# EAGLE board mcu_ori (EAGLE 9.5.0)
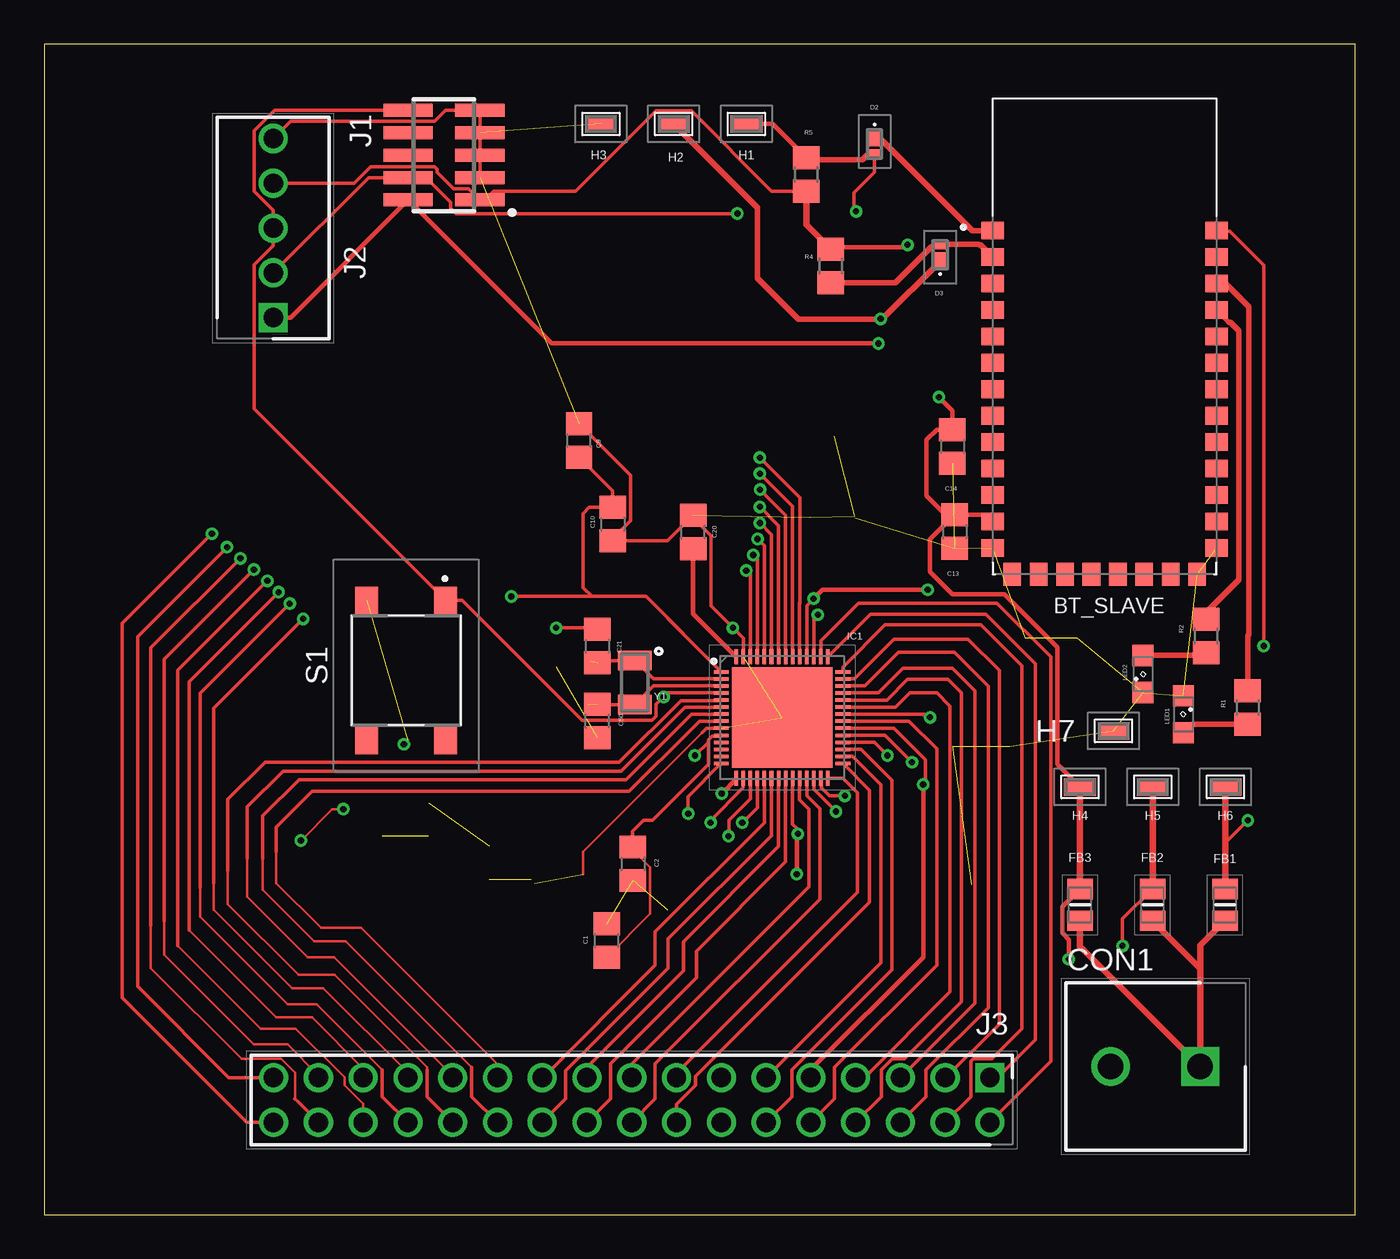
[diagram p0: board, top side]
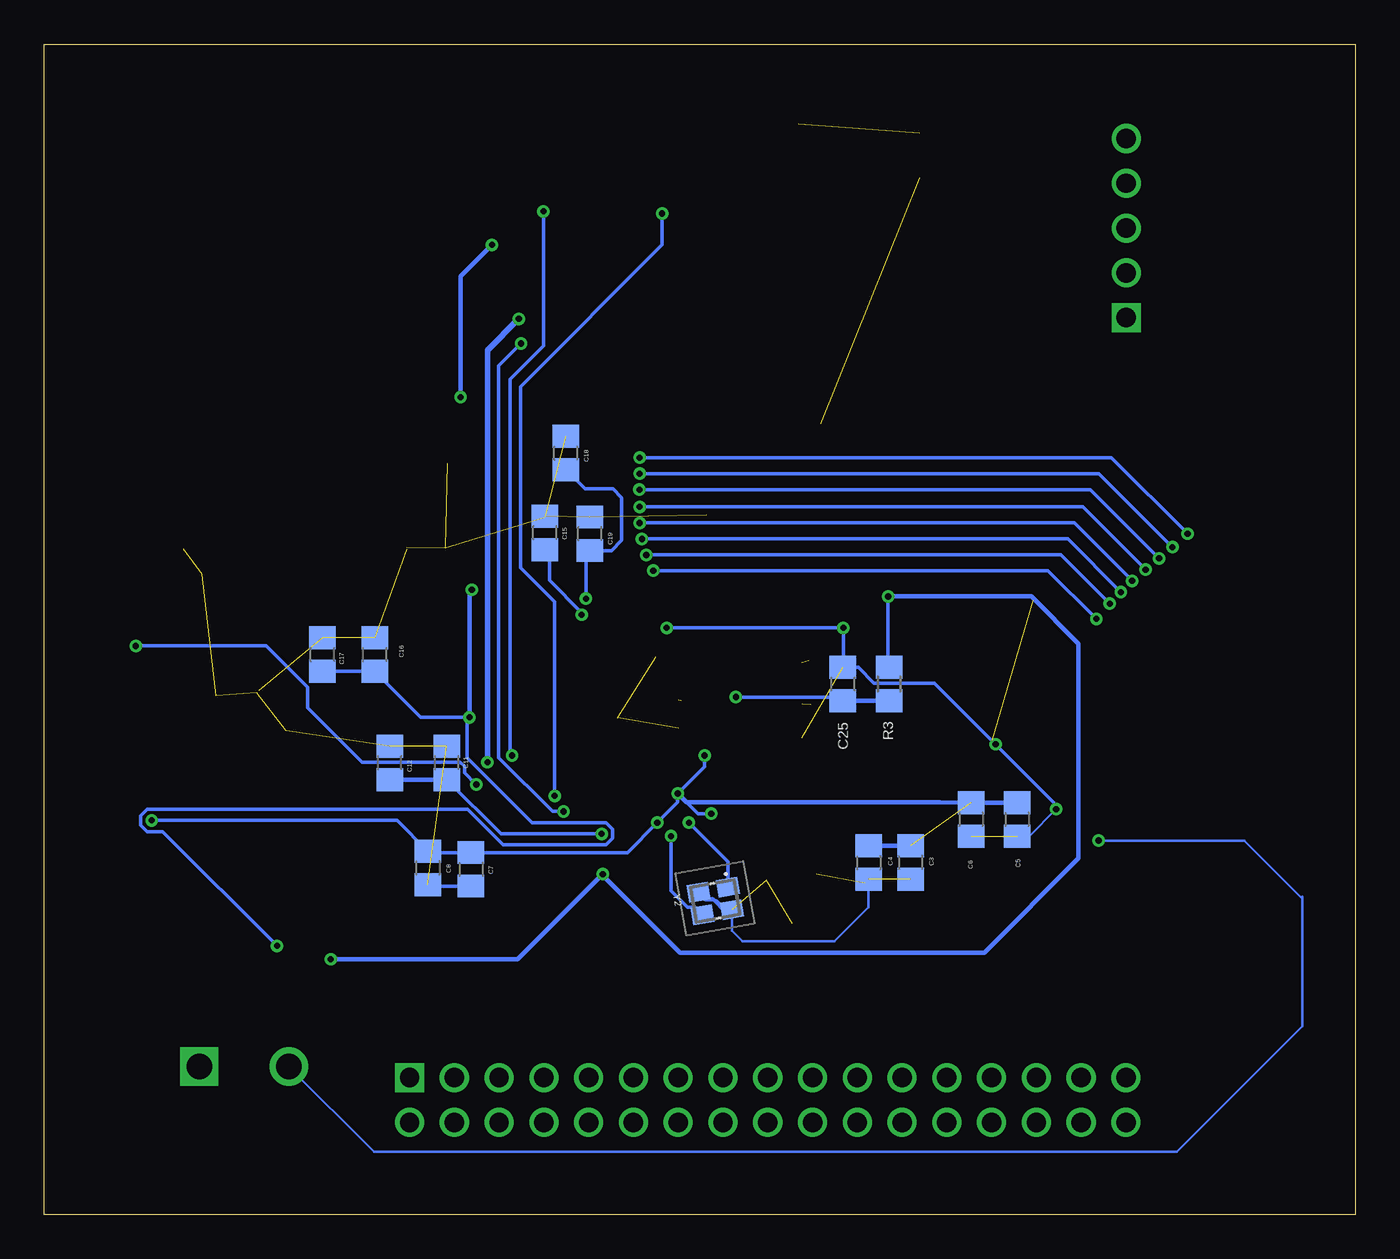
[diagram p1: board, bottom side, seen from below]

Size 74.4 x 66.38 mm. Coordinates in mm from the lower left corner, seen from the top.
Outline: 0,0 74.4,0 74.4,66.38 0,66.38 0,0
Copper layers (1*16): Top 0.0356mm / dielectric 1.5011mm / Bottom 0.0356mm
Design rules "ECE_Senior_Design": minimum track width 8mil, minimum drill 13mil, track to track 8mil, track to pad 8mil, pad to pad 6mil, via to via 8mil, smd to smd 6mil, copper to edge 15mil, drill to drill 8mil, minimum pad ring 7mil, minimum via ring 7mil, stop-mask expansion 3mil, vias tented up to drill 0mil, thermal gap 10mil

## Footprints (pad centres in the part's own frame; a part is rotated, then mirrored left to right if it is on the bottom)
XCVR_HC-05 = smd 1.3 x 1: 1 -6.35,6.325; 2 -6.35,4.825; 3 -6.35,3.325; 4 -6.35,1.825; 5 -6.35,0.325; 6 -6.35,-1.175; 7 -6.35,-2.675; 8 -6.35,-4.175; 9 -6.35,-5.675; 10 -6.35,-7.175; 11 -6.35,-8.675; 12 -6.35,-10.175; 13 -6.35,-11.675; 22 6.35,-11.675; 23 6.35,-10.175; 24 6.35,-8.675; 25 6.35,-7.175; 26 6.35,-5.675; 27 6.35,-4.175; 28 6.35,-2.675; 29 6.35,-1.175; 30 6.35,0.325; 31 6.35,1.825; 32 6.35,3.325; 33 6.35,4.825; 34 6.35,6.325 | smd 1 x 1.3: 14 -5.25,-13.175; 15 -3.75,-13.175; 16 -2.25,-13.175; 17 -0.75,-13.175; 18 0.75,-13.175; 19 2.25,-13.175; 20 3.75,-13.175; 21 5.25,-13.175
C0805 = smd 1.3 x 1.5: 1 -0.95,0; 2 0.95,0
SHDR2W90P0X508_1X2_1016X950X15 = drill 1.45 pad 2.175 square: 1 0,0 | drill 1.45 pad 2.175: 2 5.08,0
B5819XPTP = smd 1 x 0.76: 1 -0.365,0 | smd 0.56 x 0.7: 2 0.585,0
BEADC2012X105N = smd 1.15 x 1.45: 1 -0.9,0; 2 0.9,0
S276146R = smd 1.8 x 1: 1 0,0
QFN40P700X700X60-57N = smd 0.85 x 0.2: 1 -3.45,2.6; 2 -3.45,2.2; 3 -3.45,1.8; 4 -3.45,1.4; 5 -3.45,1; 6 -3.45,0.6; 7 -3.45,0.2; 8 -3.45,-0.2; 9 -3.45,-0.6; 10 -3.45,-1; 11 -3.45,-1.4; 12 -3.45,-1.8; 13 -3.45,-2.2; 14 -3.45,-2.6; 29 3.45,-2.6; 30 3.45,-2.2; 31 3.45,-1.8; 32 3.45,-1.4; 33 3.45,-1; 34 3.45,-0.6; 35 3.45,-0.2; 36 3.45,0.2; 37 3.45,0.6; 38 3.45,1; 39 3.45,1.4; 40 3.45,1.8; 41 3.45,2.2; 42 3.45,2.6 | smd 0.2 x 0.85: 15 -2.6,-3.45; 16 -2.2,-3.45; 17 -1.8,-3.45; 18 -1.4,-3.45; 19 -1,-3.45; 20 -0.6,-3.45; 21 -0.2,-3.45; 22 0.2,-3.45; 23 0.6,-3.45; 24 1,-3.45; 25 1.4,-3.45; 26 1.8,-3.45; 27 2.2,-3.45; 28 2.6,-3.45; 43 2.6,3.45; 44 2.2,3.45; 45 1.8,3.45; 46 1.4,3.45; 47 1,3.45; 48 0.6,3.45; 49 0.2,3.45; 50 -0.2,3.45; 51 -0.6,3.45; 52 -1,3.45; 53 -1.4,3.45; 54 -1.8,3.45; 55 -2.2,3.45; 56 -2.6,3.45 | smd 5.7 x 5.7: 57 0,0
FTSH-105-01-L-DV-K = smd 0.74 x 2.79: 1 -2.54,-2.035; 2 -2.54,2.035; 3 -1.27,-2.035; 4 -1.27,2.035; 5 0,-2.035; 6 0,2.035; 7 1.27,-2.035; 8 1.27,2.035; 9 2.54,-2.035; 10 2.54,2.035
HDRV5W64P0X254_1X5_1255X635X81 = drill 1.1 pad 1.65 square: 1 0,0 | drill 1.1 pad 1.65: 2 2.54,0; 3 5.08,0; 4 7.62,0; 5 10.16,0
HDRV34W90P254_2X17_4308X500X56 = drill 1.1 pad 1.65 square: 1 0,0 | drill 1.1 pad 1.65: 2 0,2.54; 3 2.54,0; 4 2.54,2.54; 5 5.08,0; 6 5.08,2.54; 7 7.62,0; 8 7.62,2.54; 9 10.16,0; 10 10.16,2.54; 11 12.7,0; 12 12.7,2.54; 13 15.24,0; 14 15.24,2.54; 15 17.78,0; 16 17.78,2.54; 17 20.32,0; 18 20.32,2.54; 19 22.86,0; 20 22.86,2.54; 21 25.4,0; 22 25.4,2.54; 23 27.94,0; 24 27.94,2.54; 25 30.48,0; 26 30.48,2.54; 27 33.02,0; 28 33.02,2.54; 29 35.56,0; 30 35.56,2.54; 31 38.1,0; 32 38.1,2.54; 33 40.64,0; 34 40.64,2.54
SML0805 = smd 1.2 x 1.2: A 1.05,0; C -1.05,0
R0805 = smd 1.3 x 1.5: 1 -0.95,0; 2 0.95,0
DTSM63NVB = smd 1.55 x 1.3: 1 -3.975,2.25; 2 3.975,2.25; 3 -3.975,-2.25; 4 3.975,-2.25
ECX-31B = smd 1.1 x 1.9: 1 -1.25,0; 2 1.25,0
ECS240836QAESTR = smd 1.2 x 1: 1 -0.85,-0.65; 2 0.85,-0.65; 3 0.85,0.65; 4 -0.85,0.65

## Placement (x,y rotation side)
BT_SLAVE  HC-05  [XCVR_HC-05]  60.17,49.48 0 top
C1  0.1u  [C0805]  31.93,15.54 90 top
C2  1u  [C0805]  33.41,19.89 270 top
C3  0.1u  [C0805]  25.24,19.98 270 bottom
C4  1u  [C0805]  27.62,19.96 270 bottom
C5  0.1u  [C0805]  19.19,22.41 270 bottom
C6  1u  [C0805]  21.81,22.41 270 bottom
C7  0.1u  [C0805]  50.17,19.58 270 bottom
C8  1u  [C0805]  52.63,19.66 270 bottom
C9  0.1u  [C0805]  30.35,43.9 90 top
C10  1u  [C0805]  32.26,39.16 270 top
C11  0.1u  [C0805]  51.55,25.61 90 bottom
C12  1u  [C0805]  54.79,25.61 90 bottom
C13  0.1u  [C0805]  51.66,38.73 270 top
C14  1u  [C0805]  51.53,43.56 270 top
C15  1uF  [C0805]  45.99,38.65 90 bottom
C16  0.1u  [C0805]  55.64,31.75 90 bottom
C17  1u  [C0805]  58.6,31.75 90 bottom
C18  0.1u  [C0805]  44.8,43.18 90 bottom
C19  1u  [C0805]  43.44,38.61 90 bottom
C20  1u  [C0805]  36.82,38.7 90 top
C21  18pF  [C0805]  31.39,32.23 270 top
C25  100p  [C0805]  29.08,30.09 90 bottom
C50  36pF  [C0805]  31.39,27.98 90 top
CON1  1888687  [SHDR2W90P0X508_1X2_1016X950X15]  65.6,8.39 180 top
D2  B5819XP-TP  [B5819XPTP]  47.12,60.72 270 top
D3  B5819XP-TP  [B5819XPTP]  50.84,54.44 90 top
FB1  330ohm, 100MHz  [BEADC2012X105N]  66.99,17.56 90 top
FB2  330ohm, 100MHz  [BEADC2012X105N]  62.88,17.56 90 top
FB3  330ohm, 100MHz  [BEADC2012X105N]  58.77,17.56 90 top
H1  S2761-46R  [S276146R]  39.84,61.85 0 top
H2  S2761-46R  [S276146R]  35.72,61.85 0 top
H3  S2761-46R  [S276146R]  31.59,61.85 0 top
H4  S2761-46R  [S276146R]  58.77,24.26 0 top
H5  S2761-46R  [S276146R]  62.9,24.26 0 top
H6  S2761-46R  [S276146R]  67.02,24.26 0 top
H7  S2761-46R  [S276146R]  60.67,27.43 0 top
IC1  CY8C4247LQI-BL483  [QFN40P700X700X60-57N]  41.87,28.18 0 top
J1  MINIPROG3  [FTSH-105-01-L-DV-K]  22.69,60.08 90 top
J2  SWD  [HDRV5W64P0X254_1X5_1255X635X81]  13,50.87 90 top
J3  90131-0937  [HDRV34W90P254_2X17_4308X500X56]  53.66,7.77 180 top
LED1  [SML0805]  64.64,28.36 270 top
LED2  [SML0805]  62.35,30.66 90 top
R1  470  [R0805]  68.29,28.76 270 top
R2  470  [R0805]  65.92,32.81 270 top
R3  4.7k  [R0805]  26.45,30.09 90 bottom
R4  4.7k  [R0805]  44.63,53.79 90 top
R5  10k  [R0805]  43.24,58.99 270 top
S1  DTSM-63N-V-B  [DTSM63NVB]  20.54,30.86 270 top
Y1  32.768KHz  [ECX-31B]  33.52,30.17 270 top
Y2  24MHz  [ECS240836QAESTR]  36.31,17.79 190 bottom

## Library data of the parts
BT_SLAVE = HC-05; AVAILABILITY: Unavailable; MF: Texas Instruments; MP: HC-05; PACKAGE: SOIC-14; PRICE: None; SPICEPREFIX: X
C1-C21 C25 C50 = rcl; SPICEPREFIX: C
CON1 = SamacSys_Parts; ALLIED_NUMBER: 70054422; DESCRIPTION: Phoenix Contact COMBICON MKDSN Series 5.08mm Pitch Straight PCB Terminal Block with Screw Termination, Through Hole; HEIGHT: 15mm; MANUFACTURER_NAME: Phoenix Contact; MANUFACTURER_PART_NUMBER: 1888687; RS_PART_NUMBER: 8045095; RS_PRICE-STOCK: http://uk.rs-online.com/web/p/products/8045095
D2 D3 = SamacSys_Parts; DESCRIPTION: Schottky Diodes & Rectifiers 1A,40V,Schottky,FBP-02L Package; HEIGHT: 0.55mm; MANUFACTURER_NAME: Micro Commercial Components (MCC); MANUFACTURER_PART_NUMBER: B5819XP-TP
FB1-FB3 = BLM21PG331SN1D; DESCRIPTION: Ferrite bead 0805 SMD 330R 1.5A Ferrite bead 0805 SMD 330R 1.5A; HEIGHT: 1.05mm; MANUFACTURER_NAME: Murata Electronics; MANUFACTURER_PART_NUMBER: BLM21PG331SN1D; RS_PART_NUMBER: 7241545P; RS_PRICE-STOCK: http://uk.rs-online.com/web/p/products/7241545P
H1-H7 = S2761-46R; DESCRIPTION: Circuit Board Hardware - PCB SMT Mini Test Terminal, Reel; HEIGHT: 1.15mm; MANUFACTURER_NAME: HARWIN; MANUFACTURER_PART_NUMBER: S2761-46R
IC1 = cy_mcu; DESCRIPTION: CYPRESS SEMICONDUCTOR - CY8C4247LQI-BL483 - MCU, 32BIT, CORTEX-M0, 48MHZ, QFN-56; HEIGHT: 0.6mm; MANUFACTURER_NAME: Cypress Semiconductor; MANUFACTURER_PART_NUMBER: CY8C4247LQI-BL483; RS_PART_NUMBER: 1242964P; RS_PRICE-STOCK: http://uk.rs-online.com/web/p/products/1242964P
J1 = SamacSys_Parts; DESCRIPTION: SMT Micro Header, 10 position, 2-row; HEIGHT: mm; MANUFACTURER_NAME: SAMTEC; MANUFACTURER_PART_NUMBER: FTSH-105-01-L-DV-K; RS_PART_NUMBER: 1592332; RS_PRICE-STOCK: https://uk.rs-online.com/web/p/products/1592332
J2 = SamacSys_Parts; ALLIED_NUMBER: 70190811; DESCRIPTION: Headers & Wire Housings VERT PCB HDR 5P TIN FRICTION LOCK; HEIGHT: 8.18mm; MANUFACTURER_NAME: Molex; MANUFACTURER_PART_NUMBER: 22-23-2051; RS_PART_NUMBER: 1888757; RS_PRICE-STOCK: http://uk.rs-online.com/web/p/products/1888757
J3 = 90131-0937; ALLIED_NUMBER: 70373750; DESCRIPTION: Molex C-GRID III Series, Series Number 90131, 2.54mm Pitch 34 Way 2 Row Straight PCB Header, Solder Termination, 3A; HEIGHT: 5.6mm; MANUFACTURER_NAME: Molex; MANUFACTURER_PART_NUMBER: 90131-0937; RS_PART_NUMBER: 6703569; RS_PRICE-STOCK: http://uk.rs-online.com/web/p/products/6703569
LED1 LED2 = led
R1-R5 = rcl; SPICEPREFIX: R
S1 = push_button; DESCRIPTION: Tactile Switches Surface Mounting Type 6*6; HEIGHT: 7.1mm; MANUFACTURER_NAME: Diptronics; MANUFACTURER_PART_NUMBER: DTSM-63N-V-B
Y1 = SamacSys_Parts; DESCRIPTION: Crystals 32.768KHz 20ppm 12.5pF -40C +85C; HEIGHT: mm; MANUFACTURER_NAME: ECS; MANUFACTURER_PART_NUMBER: ECS-.327-12.5-34B-TR
Y2 = SamacSys_Parts; DESCRIPTION: Crystals 24MHz 10ppm; HEIGHT: 0mm; MANUFACTURER_NAME: ECS; MANUFACTURER_PART_NUMBER: ECS-240-8-36CKM-TR; SPICEPREFIX: E

## Nets
3V3: CON1.1 FB1.1 FB2.1 FB3.1
/XRES: C25.1 IC1.4 J1.10 J2.3 R3.1 S1.1
BT_RX: BT_SLAVE.2 D3.2 R4.1
BT_TX: BT_SLAVE.1 D2.1
GND: BT_SLAVE.13 BT_SLAVE.21 BT_SLAVE.22 C1.2 C2.2 C3.2 C4.2 C5.2 C6.2 C7.2 C8.2 C9.2 C10.2 C11.2 C12.2 C13.2 C14.2 C15.2 C16.2 C17.2 C18.2 C19.2 C20.2 C21.1 C25.2 C50.1 CON1.2 H3.1 H7.1 IC1.9 IC1.55 IC1.57 J1.3 J1.5 J1.7 J1.9 J2.5 LED1.C LED2.C S1.3 Y2.2 Y2.4
IND1: BT_SLAVE.32 R1.1
IND2: BT_SLAVE.31 R2.1
MID1: LED1.A R1.2
MID2: LED2.A R2.2
P0.0: IC1.19 J3.21
P0.1: IC1.20 J3.22
P0.2: IC1.21 J3.19
P0.3: IC1.22 J3.20
P0.4: IC1.24 J3.17
P0.5: IC1.25 J3.18
P0.6: IC1.26 J1.2 J2.1
P0.7: IC1.27 J1.4 J2.2
P1.0: IC1.28 J3.15
P1.1: IC1.29 J3.16
P1.2: IC1.30 J3.11
P1.3: IC1.31 J3.12
P1.4: D2.2 H1.1 IC1.32 R5.1
P1.5: D3.1 H2.1 IC1.33
P1.6: BT_SLAVE.34 IC1.34 J3.9
P1.7: IC1.35 J3.10
P2.0: IC1.37 J3.7
P2.1: IC1.38 J3.8
P2.2: IC1.39 J3.5
P2.3: IC1.40 J3.6
P2.4: IC1.41 J3.3
P2.5: IC1.42 J3.4
P2.6: IC1.43 J3.1
P2.7: IC1.44 J3.2
P3.0: IC1.47 J3.34
P3.1: IC1.48 J3.33
P3.2: IC1.49 J3.32
P3.3: IC1.50 J3.31
P3.4: IC1.51 J3.30
P3.5: IC1.52 J3.29
P3.6: IC1.53 J3.28
P3.7: IC1.54 J3.27
P4.0: IC1.5 J3.26
P4.1: IC1.6 J3.25
P5.0: IC1.7 J3.24
P5.1: IC1.8 J3.23
P6.0: C21.2 IC1.2 Y1.1
P6.1: C50.2 IC1.3 Y1.2
VCCD: C20.1 IC1.56
VDDA: C16.1 C17.1 C18.1 C19.1 FB2.2 H5.1 IC1.36 IC1.46
VDDD: BT_SLAVE.12 C9.1 C10.1 C11.1 C12.1 C13.1 C14.1 FB3.2 H4.1 IC1.1 IC1.23 J1.1 J2.4 R3.2 R4.2 R5.2
VDDR: C1.1 C2.1 C3.1 C4.1 C5.1 C6.1 C7.1 C8.1 FB1.2 H6.1 IC1.10 IC1.14 IC1.15 IC1.18
VREF: C15.1 IC1.45
XTAL24I: IC1.16 Y2.1
XTAL24O: IC1.17 Y2.3

## Tracks (layer width: path | path; a pad name or v marks a point on that pad's centre or on a via)
3V3
  Top 0.381: CON1.1 65.6,15.26 FB1.1 | CON1.1 65.6,13.94 FB2.1 | CON1.1 58.77,15.22 FB3.1
/XRES  (via drill 0.35)
  Top 0.203: IC1.4 35.38,29.58 v35.15,29.35 34.73,28.93 34.73,28.27 34.49,28.03 30.53,28.03 23.72,34.84 S1.1 11.93,45.7 11.93,53.85 13,54.93 J2.3 13,56.96 11.93,58.04 11.93,61.47 13.07,62.62 J1.10
  Bottom 0.203: C25.1 29.29,29.35 v35.15,29.35
  Bottom 0.254: 29.72,29.35 C25.1 R3.1
BT_RX
  Top 0.305: BT_SLAVE.2 53.79,54.33 53.75,54.37 53.12,55 53.04,55 53.02,55.02 D3.2 50.69,54.88 50.33,54.88 48.3,52.84 R4.1
BT_TX
  Top 0.305: BT_SLAVE.1 52.67,55.8 47.4,61.08 D2.1
GND  (via drill 0.35)  (27 unrouted)
  Top 0.152: 62.38,29.72 LED2.C 62.22,29.72 | 30.91,33.33 C21.1 | 66.49,37.74 BT_SLAVE.22 | 53.84,37.74 BT_SLAVE.13 | 37.57,27.58 37.33,27.33 30.57,20.58 30.57,19.3 | v14.57,21.21 16.35,22.99 v16.98,22.99
  Top 0.203: J1.9 | J2.5 13.97,62 22.16,62 22.78,62.62 J1.9 | J1.9 J1.7 J1.5 J1.3 | v20.41,26.67 20.63,26.89 | 31.24,26.89 C50.1 | v29.05,33.27 31.3,33.27 C21.1 | IC1.55 39.67,32.69 v39.08,33.27 37.82,34.53 37.82,38.5 36.82,39.51 C20.2 35.38,38.21 C10.2 32.26,38.35 33.26,39.35 33.26,41.94 C9.2 | IC1.9 37.58,27.58 37.33,27.33
  Bottom 0.152: C15.2 46.02,39.52 | 27.83,18.8 C4.2 27.62,17.43 29.56,15.49 34.77,15.49 35.36,16.09 Y2.4 | CON1.2 55.68,3.56 10.13,3.56 3.01,10.67 3.01,17.91 | 3.01,17.91 3.01,18.03 | 3.01,17.91 6.32,21.21 v14.57,21.21 | v16.98,22.99 18.51,21.46 C5.2
  Bottom 0.203: 25.26,19.01 C3.2 | 21.81,21.45 C6.2 | C5.2 19.19,21.6 | 19.2,25.46 v20.41,26.67 | v20.41,26.67 23.88,30.13 27.3,30.13 28.21,31.04 C25.2 29.05,31.07 v29.05,33.27 v39.08,33.27 | C7.2 52.55,18.63 C8.2 | v16.98,22.99 16.98,23.24 v20.41,26.67
  Bottom 0.254: 36.81,18.28 Y2.2 36.88,17.89 36.47,17.89 36.28,17.76 35.82,17.29 Y2.4
IND1
  Top 0.305: R1.1 68.29,32.82 68.36,32.89 68.36,51.47 67.03,52.8 BT_SLAVE.32
IND2
  Top 0.254: 67.21,50.61 BT_SLAVE.31
  Top 0.305: 67.21,50.61 67.29,50.61 67.78,50.12 67.78,36.01 65.92,34.14 R2.1
MID1
  Top 0.305: LED1.A 65.14,27.82 R1.2
MID2
  Top 0.305: R2.2 65.76,31.7 LED2.A
P0.0
  Top 0.203: IC1.19 40.87,22.23 34.67,16.04 34.67,14.12 28.32,7.77 J3.21
P0.1
  Top 0.203: IC1.20 41.27,21.49 35.41,15.63 35.41,13.98 29.59,8.16 29.59,6.56 J3.22
P0.2
  Top 0.152: 41.65,24.64 IC1.21
  Top 0.203: IC1.21 41.67,20.87 36.27,15.48 36.27,13.83 30.8,8.36 J3.19
P0.3
  Top 0.203: IC1.22 42.07,20 37.01,14.94 37.01,13.43 32.14,8.56 32.14,6.56 J3.20
P0.4
  Top 0.203: IC1.24 42.87,23.52 43.4,23 43.4,18.59 33.34,8.53 J3.17
P0.5
  Top 0.203: IC1.25 43.27,23.75 44.01,23.02 44.01,17.88 34.67,8.55 34.67,6.56 J3.18
P0.6  (via drill 0.35)
  Top 0.203: IC1.26 43.67,24.12 v44.92,22.86
  Top 0.254: v47.34,49.4 28.79,49.4 J1.2 13.98,50.87 J2.1
  Bottom 0.203: v44.92,22.86 v44.93,22.86 45.56,22.86 48.61,25.9 48.61,46.61 48.61,48.13 v47.34,49.4
P0.7  (via drill 0.35)
  Top 0.203: J2.2 18.41,58.81 J1.4 21.67,58.81 23.08,57.41 23.08,57.07 23.37,56.77 v39.34,56.77 | IC1.27 44.11,24.69 44.11,24.2 44.57,23.74 v45.43,23.74
  Bottom 0.203: v45.43,23.74 45.43,34.75 47.37,36.7 47.37,46.96 39.34,54.99 v39.34,56.77
P1.0
  Top 0.203: IC1.28 45.34,24.73 46.14,23.92 46.14,18.28 35.88,8.02 J3.15
P1.1
  Top 0.203: IC1.29 46.83,24.07 46.83,17.7 36.96,7.83 36.96,7.32 35.88,6.24 J3.16
P1.2
  Top 0.203: IC1.30 45.87,25.98 47.47,24.38 47.47,14.27 J3.11
P1.3
  Top 0.203: IC1.31 46.36,26.38 48.1,24.64 48.1,13.89 42.42,8.22 42.42,6.69 J3.12
P1.4  (via drill 0.35)
  Top 0.203: IC1.32 47.1,26.78 v47.85,26.04 | 43.78,59.94 R5.1 | D2.2 47.12,59.12 45.94,57.94 45.94,57.02 v46.07,56.9
  Top 0.254: H1.1 41.34,61.85 R5.1
  Top 0.305: R5.1 43.37,59.82 46.42,59.82 46.74,60.13 D2.2
  Bottom 0.203: v47.85,26.04 47.97,26.16 47.97,47.37 46.07,49.28 v46.07,56.9
P1.5  (via drill 0.35)
  Top 0.203: IC1.33 47.71,27.18 v49.24,25.65
  Top 0.254: 45.69,50.77 45.95,50.77
  Top 0.305: 47.54,50.77 45.69,50.77 42.8,50.77 40.48,53.09 40.48,57.09 H2.1 | 47.54,50.77 D3.1 | 47.54,50.77 47.52,50.75 v47.47,50.8
  Bottom 0.305: v49.24,25.65 49.24,49.02 v47.47,50.8
P1.6  (via drill 0.35)
  Top 0.152: 66.64,55.73 BT_SLAVE.34
  Top 0.203: IC1.34 48.21,27.58 50,25.78 50,24.51 v49.88,24.38 | v69.19,32.25 69.19,53.84 67.28,55.75 66.67,55.75 66.64,55.73
  Top 0.254: v49.88,24.38 49.88,14.61 43.5,8.23 J3.9
  Bottom 0.203: v49.88,24.38 50.55,25.06 50.55,25.42 50.79,25.66 56.36,25.66 59.46,28.75 59.46,29.9 61.81,32.25 v69.19,32.25
P1.7
  Top 0.203: IC1.35 49.08,27.98 50.64,26.42 50.64,14.15 44.84,8.34 44.84,6.56 J3.10
P2.0
  Top 0.203: IC1.37 48.31,28.78 49.12,29.59 50.64,29.59 51.4,28.83 51.4,12.62 46.55,7.77 J3.7
P2.1
  Top 0.203: IC1.38 47.82,29.18 48.99,30.35 51.28,30.35 52.04,29.59 52.04,12.06 48.82,8.85 48.14,8.85 47.5,8.22 47.5,6.69 J3.8
P2.2
  Top 0.203: IC1.39 47.33,29.58 48.73,30.99 51.53,30.99 52.8,29.72 52.8,11.99 J3.5
P2.3
  Top 0.203: IC1.40 46.58,29.98 48.48,31.88 51.66,31.88 53.56,29.97 53.56,11.73 50.04,8.22 50.04,6.69 J3.6
P2.4
  Top 0.203: IC1.41 45.97,30.38 48.23,32.64 52.42,32.64 54.2,30.86 54.2,10.79 52.61,9.2 52.58,9.2 51.15,7.77 J3.3
P2.5
  Top 0.203: IC1.42 45.32,31.03 47.72,33.44 53.15,33.44 55.47,31.11 55.47,10.54 53.77,8.85 52.73,8.85 52.58,8.7 52.58,6.69 J3.4
P2.6
  Top 0.203: IC1.43 46.87,34.04 53.43,34.04 56.23,31.24 56.23,9.91 54.09,7.77 J3.1
P2.7
  Top 0.203: IC1.44 44.07,32.54 46.19,34.67 54.07,34.67 57.12,31.62 57.12,8.68 J3.2
P3.0  (via drill 0.35)
  Top 0.203: IC1.47 42.87,34.69 42.9,34.66 42.9,40.64 v40.61,42.93 | v9.52,38.61 4.44,33.53 4.44,12.28 11.5,5.23 J3.34
  Bottom 0.203: v40.61,42.93 13.84,42.93 v9.52,38.61
P3.1  (via drill 0.35)
  Top 0.203: IC1.48 42.47,40.16 v40.61,42.02 | v10.38,37.85 5.3,32.77 5.3,12.95 10.48,7.77 J3.33
  Bottom 0.203: v40.61,42.02 14.55,42.02 v10.38,37.85
P3.2  (via drill 0.35)
  Top 0.152: 6.06,16.38 6.06,13.97 11.21,8.82 13.46,8.82 14.25,8.03 14.25,6.54 14.38,6.41
  Top 0.203: IC1.49 42.07,39.66 v40.62,41.11 | 14.23,6.56 14.25,6.54 | J3.32 14.38,6.41 | v11.14,37.21 6.06,32.13 6.06,16.38
  Bottom 0.203: v40.62,41.11 15.04,41.11 v11.14,37.21
P3.3  (via drill 0.35)
  Top 0.152: 41.65,31.65 IC1.50 | 6.83,16.64 6.83,14.73 11.9,9.65 13.81,9.65 15.56,7.9 J3.31
  Top 0.203: IC1.50 41.67,39.07 v40.61,40.13 | v11.9,36.58 6.83,31.5 6.83,16.64 6.83,16.63
  Bottom 0.203: v40.61,40.13 15.46,40.13 v11.9,36.58
P3.4  (via drill 0.35)
  Top 0.152: 7.59,15.24 12.28,10.54 14.28,10.54 17.05,7.77 17.05,7.33 18.1,6.28 J3.30
  Top 0.203: IC1.51 41.27,38.56 v40.61,39.22 | v12.67,35.94 7.59,30.86 7.59,15.24
  Bottom 0.203: v40.61,39.22 15.95,39.22 v12.67,35.94
P3.5  (via drill 0.35)
  Top 0.152: 40.89,31.65 IC1.52 | 8.23,16.12 13.17,11.18 15.21,11.18 18.1,8.28 J3.29
  Top 0.203: IC1.52 40.87,37.93 v40.48,38.31 | v13.31,35.3 8.23,30.22 8.23,16.12
  Bottom 0.203: v40.48,38.31 16.33,38.31 v13.31,35.3
P3.6  (via drill 0.35)
  Top 0.152: 8.86,18.54 8.86,16.89 13.81,11.94 15.46,11.94 19.18,8.22
  Top 0.203: IC1.53 40.47,37.17 v40.24,37.41 | J3.28 19.18,6.69 19.18,8.22 | v13.94,34.65 8.86,29.57 8.86,18.54
  Bottom 0.203: v40.24,37.41 16.7,37.41 v13.94,34.65
P3.7  (via drill 0.35)
  Top 0.152: 9.62,18.79 9.62,17.27 14.06,12.83 15.84,12.83 20.64,8.03 J3.27
  Top 0.203: IC1.54 40.07,36.29 v39.84,36.52 | v14.7,33.78 9.62,28.7 9.62,18.79
  Bottom 0.203: v39.84,36.52 17.44,36.52 v14.7,33.78
P4.0  (1 unrouted)
  Top 0.152: 10.43,19.51 10.43,17.61 14.45,13.59 16.48,13.59 21.72,8.35 21.72,8.22
  Top 0.203: 38.26,29.15 36.12,29.15 32.63,25.65 12.54,25.65 10.43,23.54 10.43,19.51 | J3.26 21.72,6.69 21.72,8.22
P4.1
  Top 0.152: 11.52,20.19 11.52,18.03 14.95,14.61 16.45,14.61 23.18,7.87
  Top 0.203: IC1.6 36.37,28.78 32.73,25.15 13.56,25.15 11.52,23.11 11.52,20.19 | J3.25 23.18,7.87
P5.0
  Top 0.152: 12.41,20.19 12.41,18.41 15.33,15.49 17.11,15.49 24.26,8.35 24.26,8.26
  Top 0.203: IC1.7 36.72,28.38 33.01,24.66 14.47,24.66 12.41,22.61 12.41,20.19 | J3.24 24.26,6.69 24.26,8.26 24.26,8.34
P5.1
  Top 0.152: 13.18,20.57 13.18,18.8 15.71,16.26 18,16.26 25.72,8.54 25.72,7.87
  Top 0.2: 37.13,27.93 36.7,27.5 33.2,24 15.21,24 13.18,21.97 13.18,20.57 | J3.23 25.72,7.87 25.72,8.02
  Top 0.203: IC1.8 37.17,27.98 37.13,27.93 36.7,27.5
P6.0  (1 unrouted)
  Top 0.203: IC1.2 34.56,30.38 Y1.1 31.02,31.42
P6.1  (1 unrouted)
  Top 0.203: IC1.3 34.59,29.98 Y1.2 30.89,28.92
VCCD
  Top 0.254: IC1.56 36.82,34.08 C20.1
VDDA  (via drill 0.35)
  Top 0.203: IC1.46 43.27,34.54 v43.66,34.92 | FB2.2 61.18,16.76 v61.18,15.24 | v50.26,28.19 50.07,28.38 IC1.36
  Top 0.254: v50.13,35.43 44.16,35.43 v43.66,34.92
  Top 0.381: H5.1 62.9,18.48 FB2.2
  Bottom 0.203: C17.1 C16.1 53.03,28.19 50.39,28.19 | v43.66,34.92 43.66,37.45 C19.1 42.19,37.66 41.62,38.23 41.62,40.64 42.13,41.15 43.72,41.15 C18.1 | v50.26,28.19 50.39,28.19 | v61.18,15.24 67.66,21.72 68.56,21.72 68.92,22.09 68.92,22.61 68.56,22.98 50.38,22.98 48.35,20.96 42.5,20.96 42.13,21.33 42.13,21.85 42.5,22.22 46.7,22.22 50.39,25.9 50.39,28.19
  Bottom 0.254: 55.77,30.67 C16.1 | v50.26,28.19 50.26,35.31 v50.13,35.43
VDDD  (via drill 0.35)
  Top 0.152: 53.69,39.42 53.78,39.34 BT_SLAVE.12
  Top 0.203: 35.4,33.8 IC1.1 34.15,35.05 31.08,35.05 | C10.1 32.38,40.11 | C10.1 32.26,41.04 C9.1 | 31.08,35.05 v26.51,35.05 | IC1.23 42.47,22.14 42.77,21.84 v42.77,21.59 | R5.2 41.28,58.04 36.72,62.6 34.71,62.6 30.15,58.04 25.49,58.04 24.99,57.54 J1.1 24.08,58.19 23.23,58.19 22.3,59.11 22.3,59.29 22.16,59.44 18.53,59.44 17.58,58.48 J2.4 | C10.1 30.93,40.11 30.57,39.75 30.57,35.56 31.08,35.05
  Top 0.254: H4.1 57.5,25.53 57.5,32.16 54.48,35.18 51.53,35.18 50.26,36.45 50.26,38.29 C13.1 | v50.77,46.35 51.53,45.59 C14.1 50.64,44.51 50.06,43.93 50.06,40.78 51.15,39.69 C13.1 | v48.99,54.99 48.85,54.85 44.53,54.85 | C13.1 53.43,39.69 53.78,39.34 | v58.13,14.48 58.13,15.6 57.76,15.97 57.76,17.45 FB3.2 | v42.7,19.3 42.7,21.52 v42.77,21.59
  Top 0.381: R4.2 44.53,54.85 43.24,56.13 R5.2 | FB3.2 H4.1
  Bottom 0.203: v26.51,35.05 26.51,31.1 R3.2 | v42.77,21.59 48.48,21.59 C11.1
  Bottom 0.254: C12.1 C11.1 | v50.77,46.35 50.77,53.21 v48.99,54.99 | v58.13,14.48 47.53,14.48 42.73,19.27 | 42.73,19.27 v42.7,19.3 | v26.51,35.05 18.38,35.05 15.71,32.38 15.71,20.19 21.05,14.86 38.32,14.86 42.73,19.27
VDDR  (via drill 0.35)  (1 unrouted)
  Top 0.152: C2.1 33.41,20.67 34.39,19.69 34.39,17.05 C1.1
  Top 0.203: IC1.14 36.54,23.7 v36.54,22.73 | IC1.18 40.47,23.08 v39.61,22.23 | C2.1 33.38,20.82 33.38,21.73 34,22.35 34.51,22.35 37.69,25.53 37.69,26.8 | IC1.10 38.37,27.13 37.89,27.13 37.69,26.93 37.69,26.8 | FB1.2 66.99,21.05 v68.29,22.35 | v36.92,26.04 37.69,26.8
  Top 0.254: IC1.15 39.28,24.71 v38.45,23.88
  Top 0.381: H6.1 67.02,18.49 FB1.2
  Bottom 0.203: v68.29,22.35 54.37,22.35 C8.1 52.55,20.53 C7.1 41.31,20.53 v39.61,22.23 38.45,23.39 v38.45,23.88 | v38.45,23.88 37.3,22.73 v36.54,22.73 | v38.45,23.88 36.92,25.4 v36.92,26.04
  Bottom 0.254: C5.1 C6.1 23.57,23.38 23.58,23.37 37.94,23.37 v38.45,23.88 | C3.1 25.26,20.91 C4.1
VREF  (via drill 0.35)
  Top 0.203: IC1.45 43.67,33.78 v43.9,34.02
  Bottom 0.203: v43.9,34.02 43.9,34.14 45.73,35.97 45.73,37.45 C15.1
XTAL24I  (via drill 0.35)
  Top 0.203: IC1.16 39.67,24.2 37.81,22.35 v37.81,22.23
  Bottom 0.203: v37.81,22.23 35.59,20 Y2.1
XTAL24O  (via drill 0.35)
  Top 0.203: IC1.17 40.07,23.58 38.85,22.36 38.85,21.49 v38.83,21.46
  Bottom 0.203: Y2.3 37.45,17.41 37.88,17.41 38.83,18.36 v38.83,21.46